# Altium PCB DHT11.PcbDoc
Units mm, origin at the board's own origin, x right, y up, seen from the top; angles counter-clockwise.
Board outline 31.94 x 23.94 mm, 2 copper layers (Top Layer, Bottom Layer); 9 components, 4 nets, 17 pads, 48 vias.
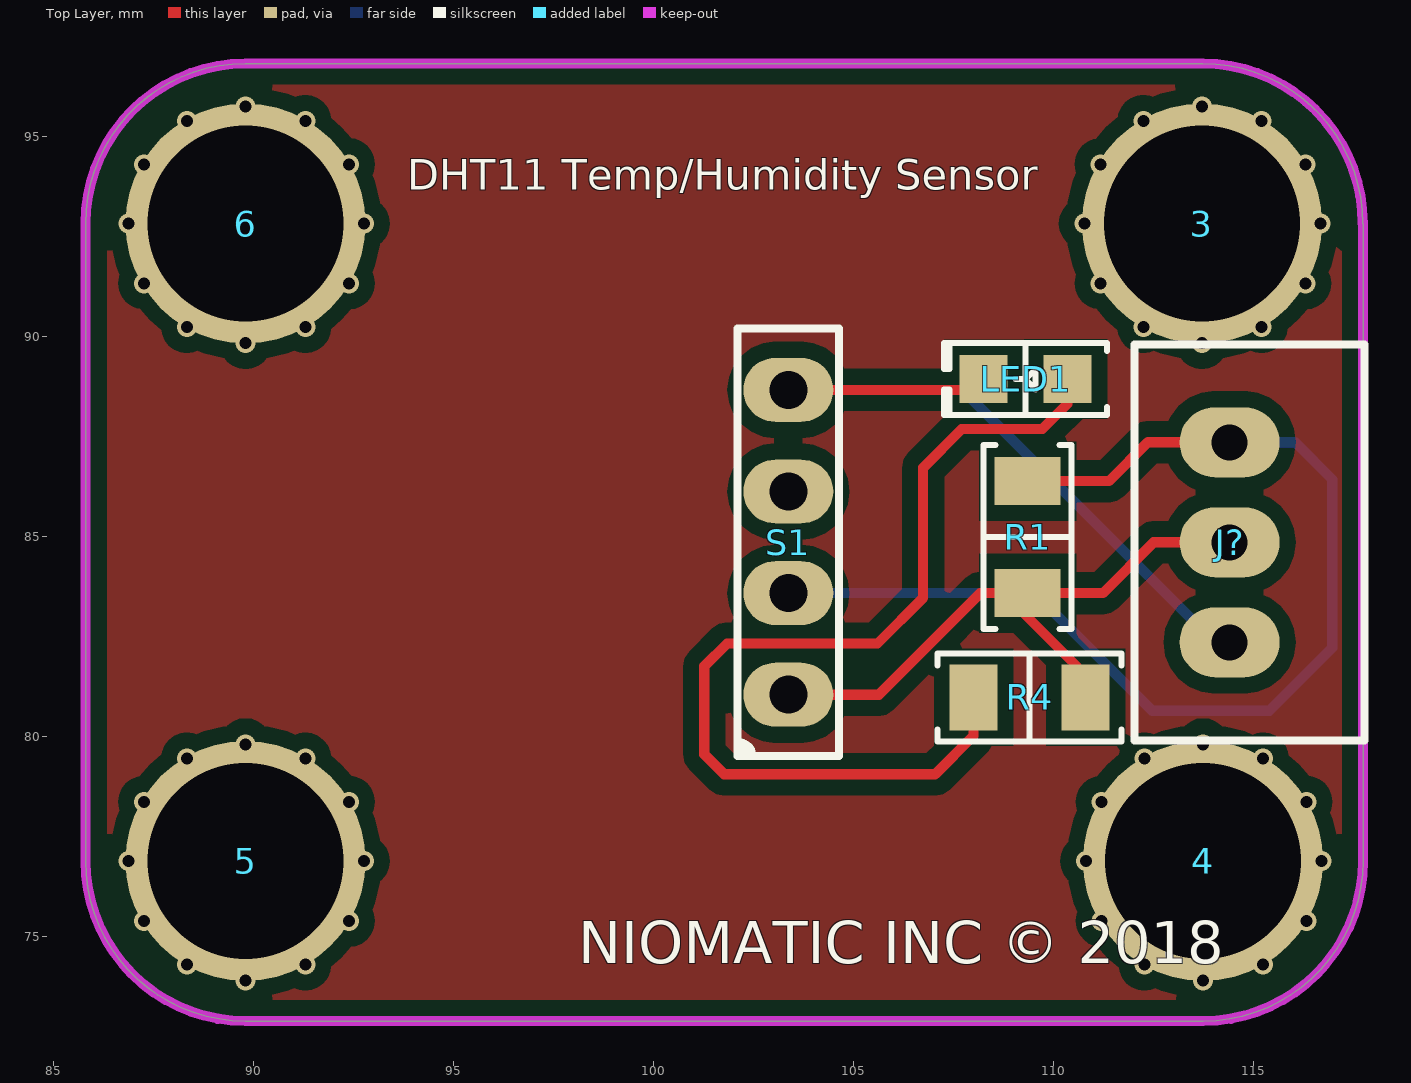
[diagram p0: Top Layer view]
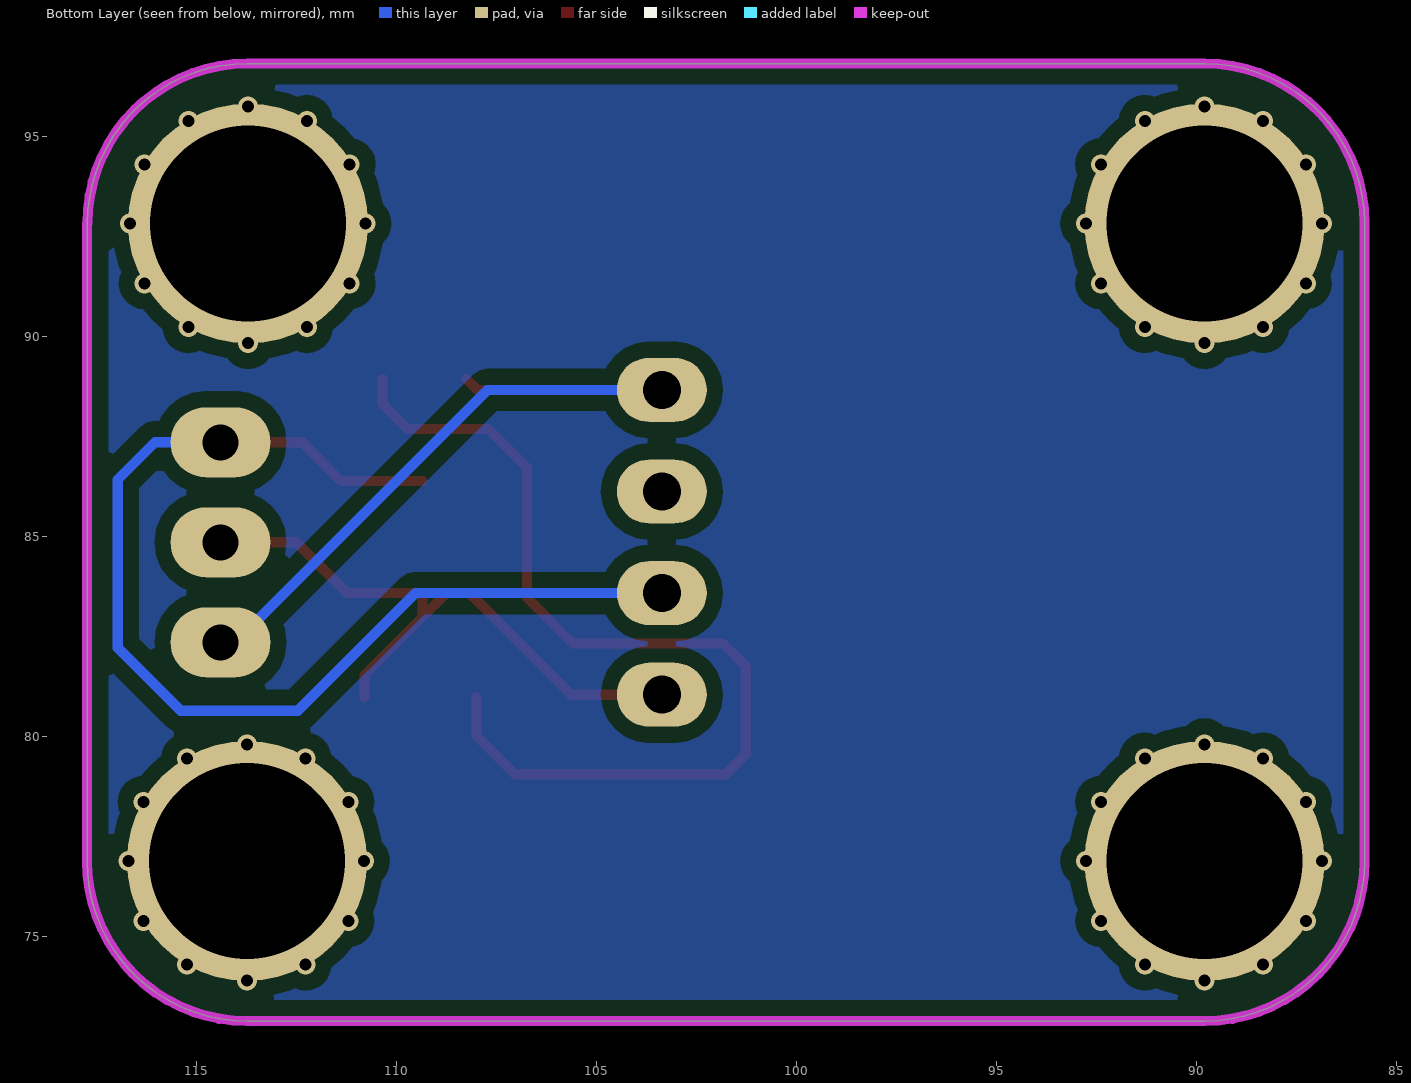
[diagram p1: Bottom Layer view, seen from below]
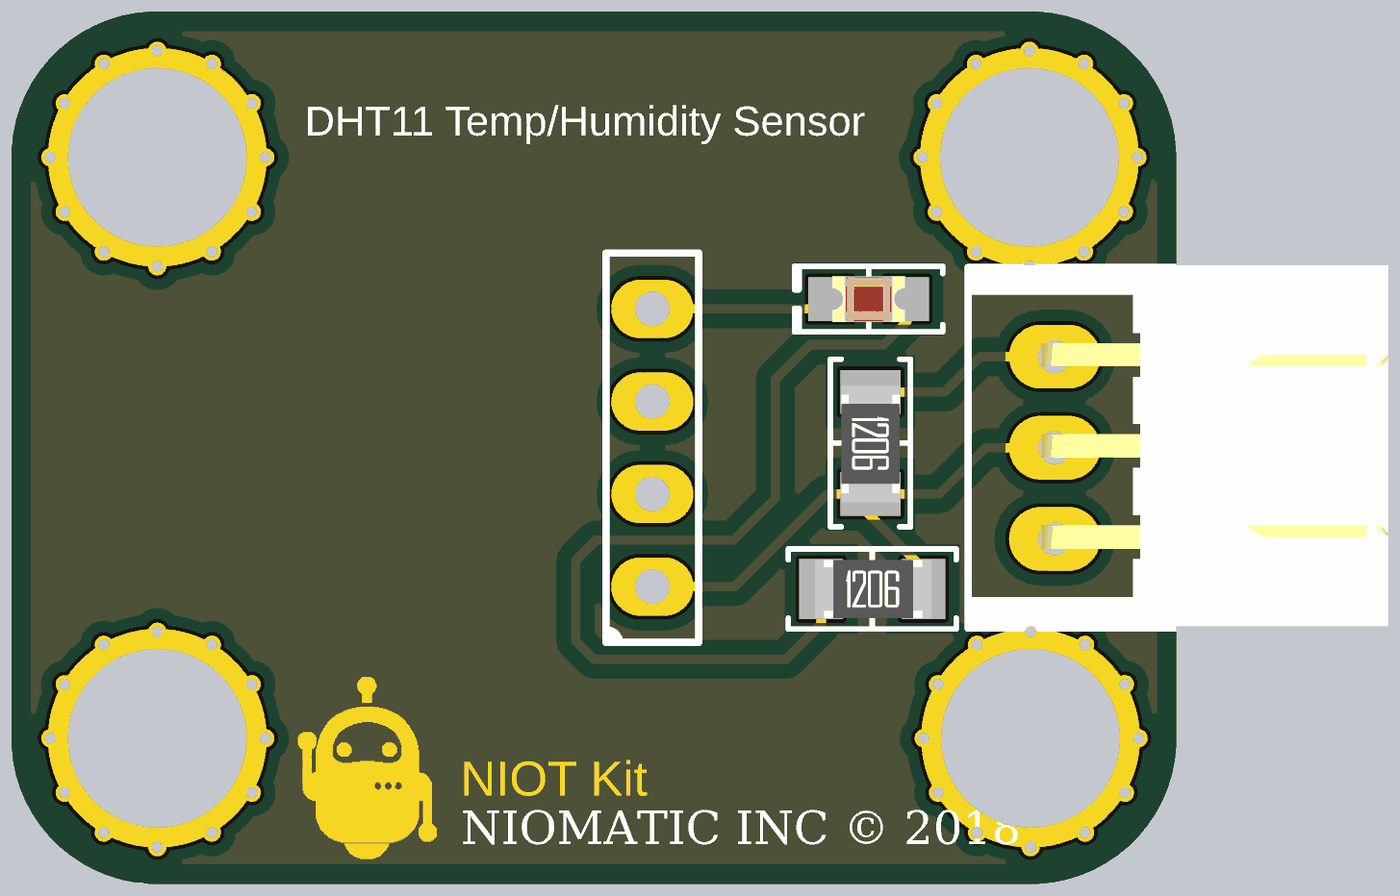
[diagram p2: 3D render of the assembled board from above, using the file's embedded part models]

## Layer stack, top to bottom
Top Solder: solder mask 0.0102, Solder Resist, Dk 3.5
Top Layer: signal copper 0.0356
Dielectric 1: dielectric 0.32, FR-4, Dk 4.8
Bottom Layer: signal copper 0.0356
Bottom Solder: solder mask 0.0102, Solder Resist, Dk 3.5

## Board outline
85.79,76.88 85.79,92.82 cw(c89.79,92.82) 89.79,96.82 113.72,96.82 cw(c113.72,92.82) 117.72,92.82 117.729,92.82 117.729,76.88 cw(c113.729,76.88) 113.729,72.88 89.79,72.88 cw(c89.79,76.88)

## Design rules (kind name [scope] priority, off if disabled: settings)
Clearance [All] p1: gap=0.4 ignorepadtopadclearanceinfootprint=FALSE
PolygonConnect [All] p1: connectstyle=Relief reliefconductorwidth=0.254 reliefentries=4 polygonreliefangle="90 Angle" airgapwidth=0.254
RoomDefinition DHT11 [InComponentClass('DHT11')] p1: confinementstyle=ConfineIn formatcopy=TRUE lockcomponents=FALSE outline 178.943,26.924 198.247,26.924 198.247,44.577 178.943,44.577
RoutingVias [All] p1: holewidth=0.711 width=1.27 viastyle="Through Hole" minholewidth=0.711 minwidth=1.27 maxholewidth=0.711 maxwidth=1.27
SolderMaskExpansion [All] p1: expansion=0.102
Width [All] p1: maxlimit=0.254 minlimit=0.254 preferedwidth=0.254
30 further rules are at their usual default settings.

## Classes and differential pairs
component class DHT11: J? LED1 R1 R4 S1

## Components (designator, comment, footprint, x,y, rotation, side; value= is the part's Value field where it differs from the comment)
3 "Lego" "Lego Hole" 113.7,92.82 r90 top
4 "Lego" "Lego Hole" 113.73,76.88 r90 top
5 "Lego" "Lego Hole" 89.79,76.88 r90 top
6 "Lego" "Lego Hole" 89.79,92.82 r90 top
J? "Header" "JST XH B3B-XH-A - RIGHT" 114.392,84.85 r90 top
LED1 "RED" "LED 0805/2012 RED" 109.29,88.93 r180 top value=Green
R1 "1K" "RES 1206/3216" 109.34,84.98 r270 top
R4 "1K" "RES 1206/3216" 109.39,80.975 r0 top
S1 "4 Pin" DHT11 103.36,84.85 r90 top

## Footprints (in the part's own frame and the unit in brackets; to place one, negate y for a bottom-side part, rotate by r counter-clockwise, add the part's x,y. Pads: shape width x height; smd on the part's side, far side on the other; paste and mask are expansions set on the pad)
DHT11 [mm] "DHT11 Humidity/Temp Sensor"
  oval 1.6x2.25 hole 0.95: 1(-3.81,0) 2(-1.27,0) 3(1.27,0) 4(3.81,0)
  silkscreen extent -5.34,-1.27 5.34,1.27, body extent -6,1.9 6,17.41, height 5.5
"JST XH B3B-XH-A - RIGHT" [mm]
  oval 1.75x2.5 hole 0.9: 1(-2.5,0) 2(0,0) 3(2.5,0)
  silkscreen extent -4.95,-3.38 4.95,2.38, body extent -4.9,-9.15 5,2.35, height 6.1
"LED 0805/2012 RED" [mm] "Chip Diode, 2-Leads, Body 2.00x1.25mm, IPC Medium Density"
  rect 1.2x1.2 smd: 1(-1.05,0) 2(1.05,0)
  silkscreen extent -2.03,-0.9 2.03,0.9, body extent -1,-0.62 1,0.63, height 0.9
"Lego Hole" [mm]
  round 6 hole 4.9: 0(0,0)
"RES 1206/3216" [mm] "Chip Resistor, 2-Leads, Body 3.13x1.55mm, IPC Medium Density"
  rect 1.2x1.65 smd: 1(-1.4,0) 2(1.4,0)
  silkscreen extent -2.3,-1.1 2.3,1.1, body extent -1.57,-0.8 1.62,0.8, height 0.6

## Part data
J?: library part "3 Pin"
LED1: library part LED, "Chip LED"
R1 R4: library part Resistor, "SMT Resistor"
S1: library part DHT11

## Via types
v1: diameter 0.5, hole 0.3, Top Layer to Bottom Layer, 48 vias

## Nets (pads, with @x,y where several pads share a name; then routed paths per layer and width w, separated by ;. In a path a pad name is that pad's centre, name@x,y a point inside that pad or via, vN(x,y) a via of type N, cw(c..) or ccw(c..) an arc to the next point about the centre after c; other vN are vias at no path point)
Data: J?.3 R1.1 S1.2 | length 28.1
  Top Layer w0.254: R1.1 111.379,86.38 112.349,87.35 J?.3
  Bottom Layer w0.254: S1.2 109.52,83.58 112.46,80.64 115.387,80.64 116.96,82.213 116.96,86.42 116.03,87.35 J?.3
GND: J?.1 LED1.2 S1.4 | length 18.6
  Top Layer w0.254: S1.4 107.97,88.66 LED1.2
  Bottom Layer w0.254: S1.4 107.711,88.66 114.021,82.35 J?.1
NetLED1_1: LED1.1 R4.1 | length 24.8
  Top Layer w0.254: R4.1 107.99,80.01 107.03,79.05 101.76,79.05 101.26,79.55 101.26,81.75 101.83,82.32 105.59,82.32 106.73,83.46 106.73,86.715 107.696,87.681 109.711,87.681 110.34,88.31 LED1.1
VCC: J?.2 R1.2 R4.2 S1.1 | length 16.1
  Top Layer w0.254: S1.1 105.62,81.04 108.16,83.58 108.744,83.58 R1.2@109.34,82.984 ; R4.2 110.79,81.534 R1.2@109.34,82.984 ; J?.2 112.497,84.85 111.227,83.58 R1.2 R1.2@109.34,82.984
pads on no net: 3.0 4.0 5.0 6.0 S1.3
copper on no net:
  other v1: 89.79,73.891 113.73,73.891 88.324,74.291 91.285,74.291 112.264,74.291 115.225,74.291 87.252,75.386 92.379,75.386 111.192,75.386 116.319,75.386 86.86,76.88 92.75,76.88 110.8,76.88 116.69,76.88 87.252,78.361 92.379,78.361 111.192,78.361 116.319,78.361 88.324,79.444 91.285,79.444 112.264,79.444 115.225,79.444 89.79,79.801 113.73,79.801 89.79,89.831 113.7,89.831 88.324,90.231 91.285,90.231 112.234,90.231 115.194,90.231 87.252,91.325 92.379,91.325 111.162,91.325 116.289,91.325 86.86,92.82 92.75,92.82 110.77,92.82 116.66,92.82 87.252,94.301 92.379,94.301 111.162,94.301 116.289,94.301 88.324,95.384 91.285,95.384 112.234,95.384 115.194,95.384 89.79,95.741 113.7,95.741

## Polygon pours and split planes (outlines as drawn)
no net on Top Layer "Top Layer-No Net" (solid, pour order 0): 85.79,76.88 85.79,92.82 cw(c89.79,92.82) 89.79,96.82 113.72,96.82 cw(c113.72,92.82) 117.72,92.82 117.729,92.82 117.729,76.88 cw(c113.729,76.88) 113.729,72.88 89.79,72.88 cw(c89.79,76.88)
no net on Bottom Layer "Top Layer-No Net1" (solid, pour order 1): 85.79,76.88 85.79,92.82 cw(c89.79,92.82) 89.79,96.82 113.72,96.82 cw(c113.72,92.82) 117.72,92.82 117.729,92.82 117.729,76.88 cw(c113.729,76.88) 113.729,72.88 89.79,72.88 cw(c89.79,76.88)

## Keep-outs
Keep-Out Layer:
  lines w0.254: 117.72,92.82 ccw(c113.72,92.82) 113.72,96.82 89.79,96.82 ccw(c89.79,92.82) 85.79,92.82 85.79,76.88 ccw(c89.79,76.88) 89.79,72.88 113.729,72.88 ccw(c113.729,76.88) 117.729,76.88 117.729,92.82

## Silkscreen, mask and mechanical layers (free items; w line width, h text height)
Top Overlay:
  text "DHT11 Temp/Humidity Sensor" at 93.83,93.42 h1.3
  text "NIOMATIC INC © 2018" at 98.11,73.98 h1.8
Top Solder:
  drawing of 381 lines, arcs and shapes, not listed
  text "NIOT Kit" at 98.1,75.31 h1.52